# Altium PCB BTL_mach_nap_acquy_12v.PcbDoc
Units mil, origin at the board's own origin, x right, y up, seen from the top; angles counter-clockwise.
Board outline 2785.03 x 2090.03 mil, 2 copper layers (Top Layer, Bottom Layer); 29 components, 17 nets, 70 pads, 0 vias.
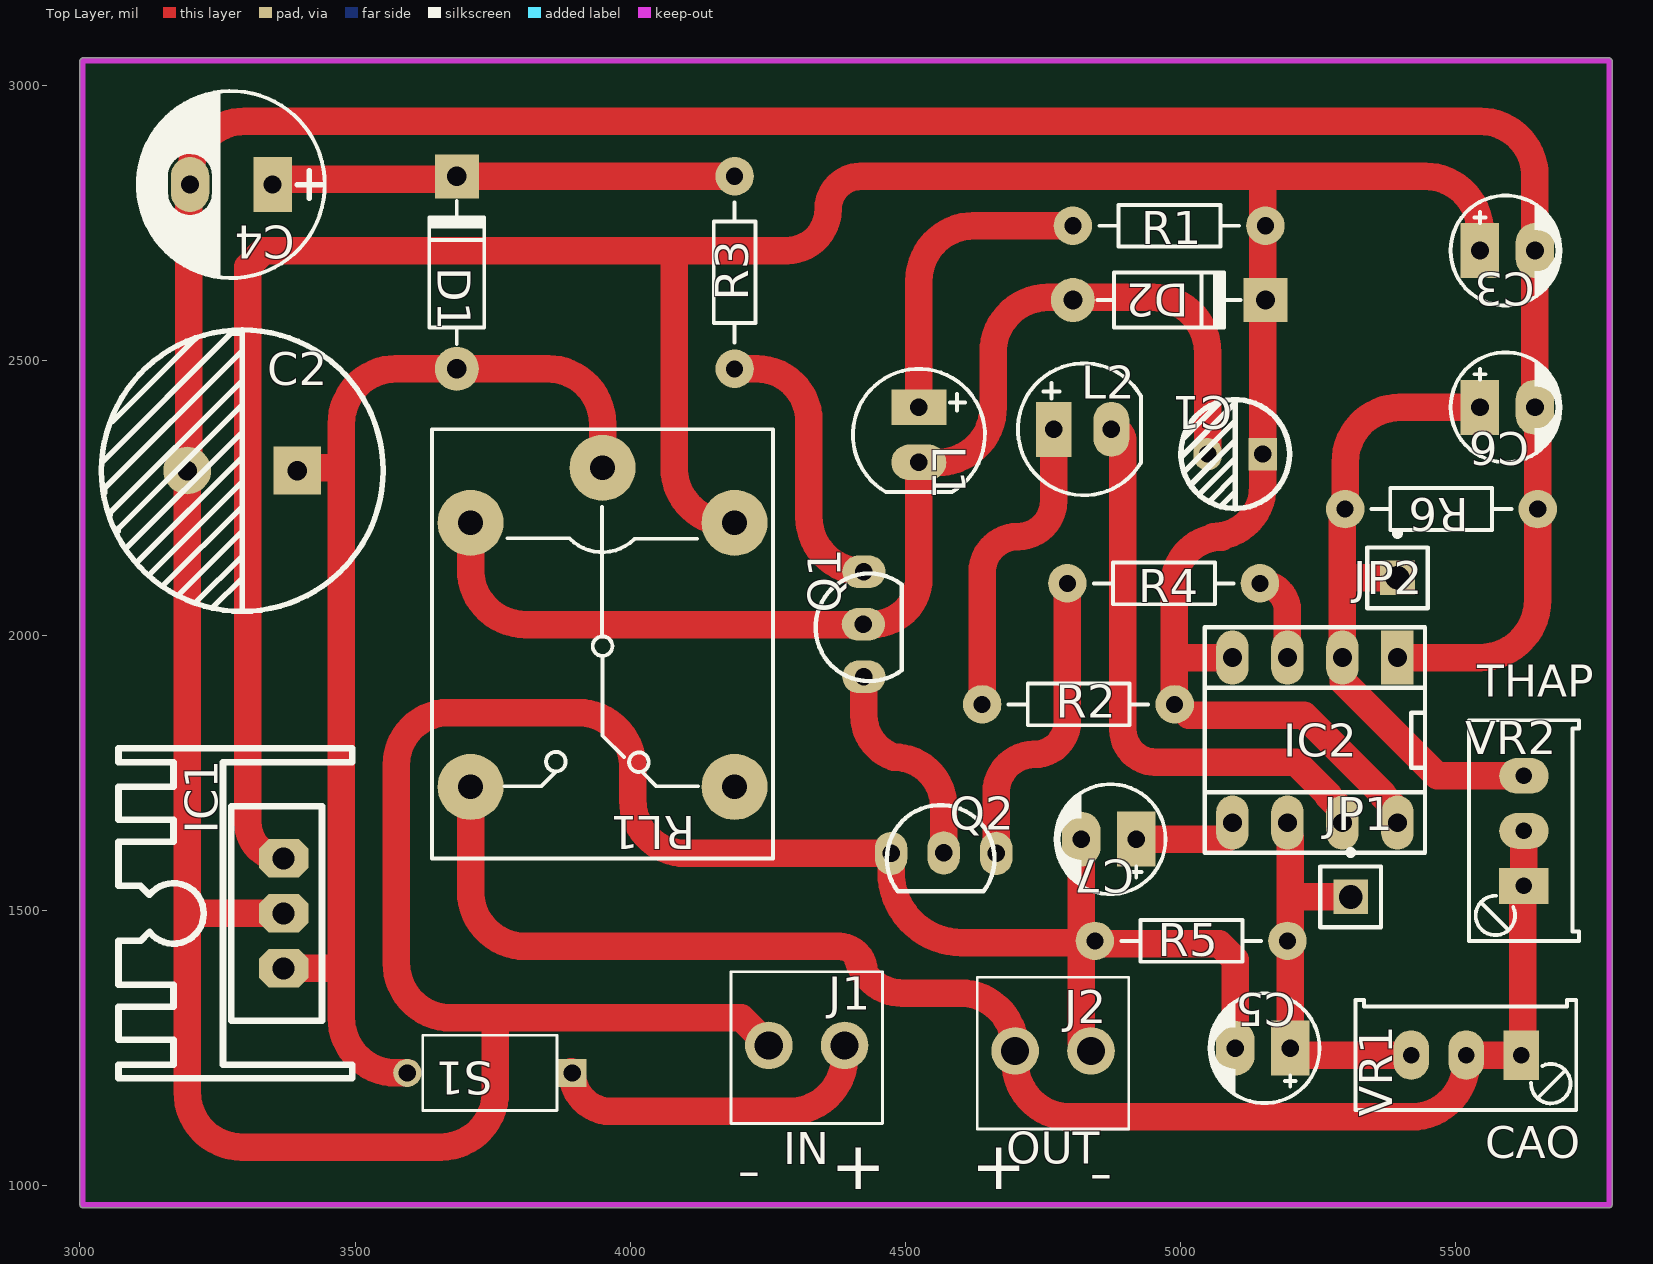
[diagram p0: Top Layer view]
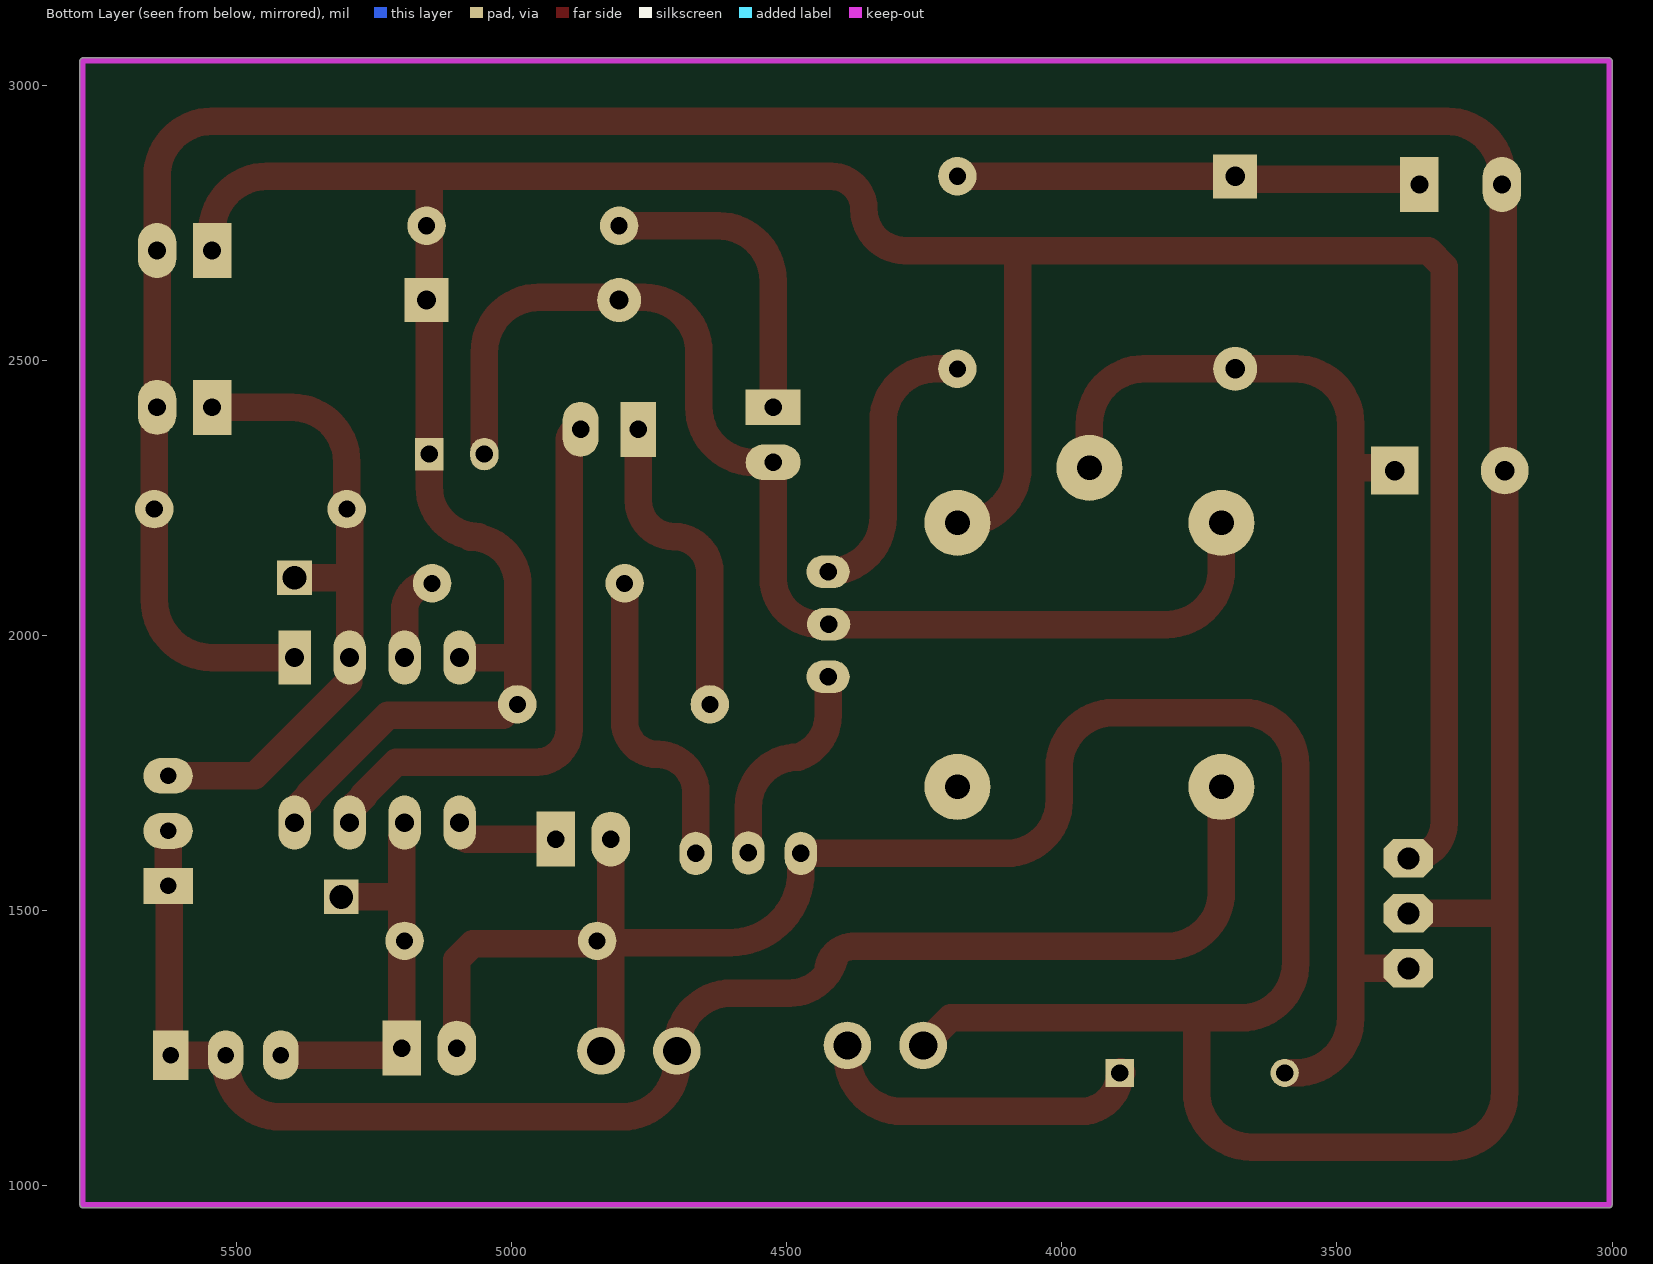
[diagram p1: Bottom Layer view, seen from below]
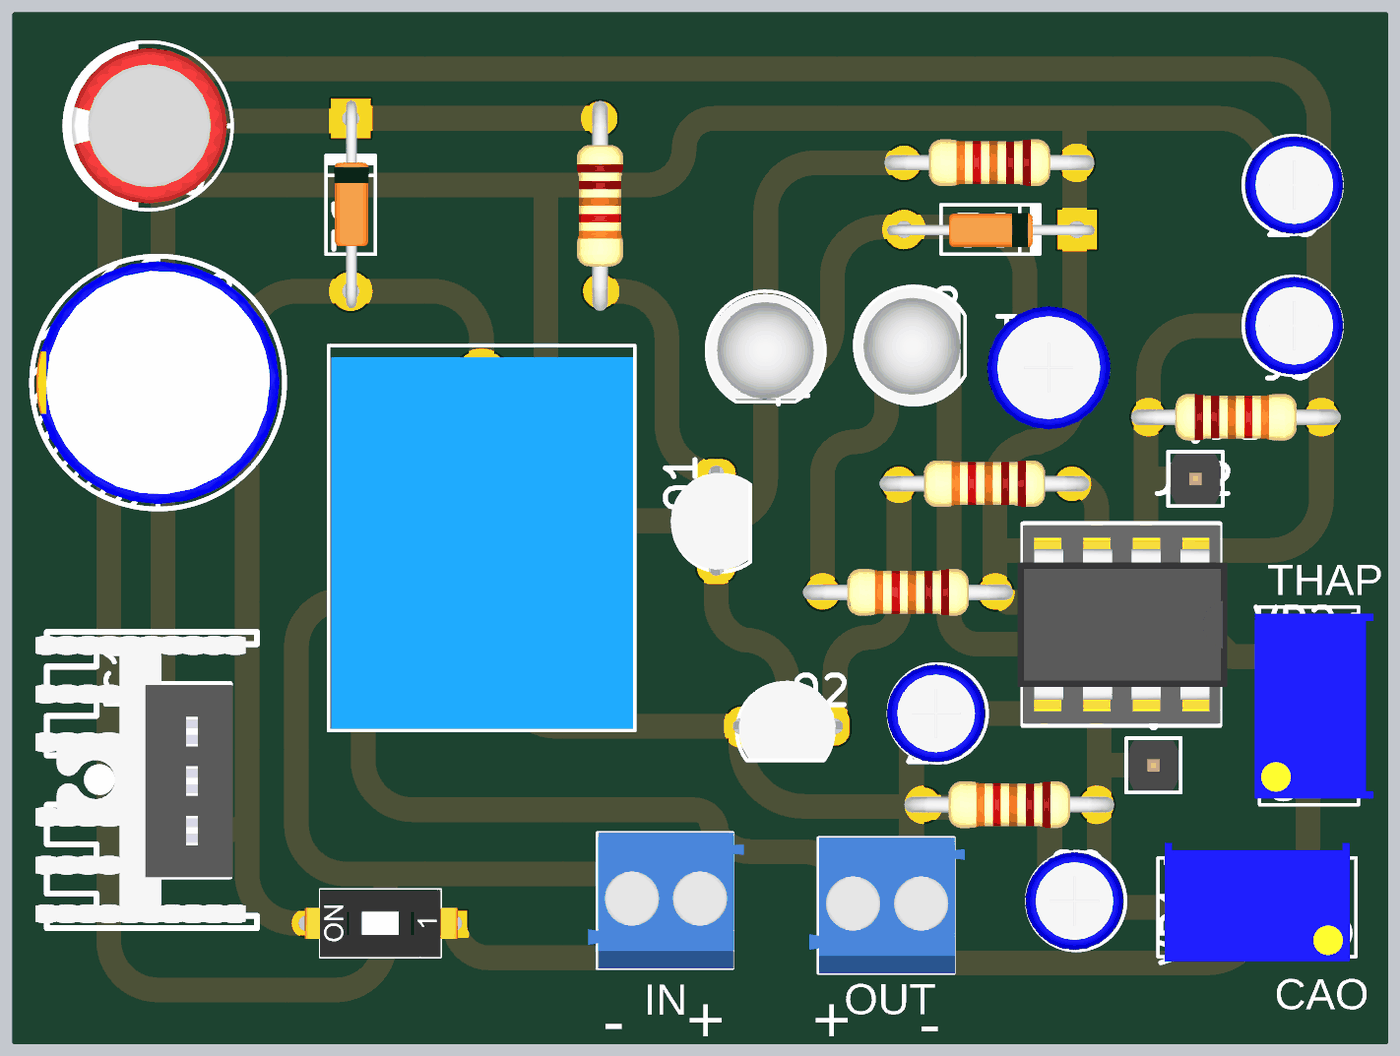
[diagram p2: 3D render of the assembled board from above, using the file's embedded part models]

## Layer stack, top to bottom
Top Solder: solder mask 0.4, Solder Resist, Dk 3.5
Top Layer: signal copper 1.4
Dielectric 1: dielectric 12.6, FR-4, Dk 4.8
Bottom Layer: signal copper 1.4
Bottom Solder: solder mask 0.4, Solder Resist, Dk 3.5

## Board outline
2999.99,965 2999.98,3045 cw(c3005,3045) 3005,3050.01 5780,3050.01 cw(c5780,3045) 5785.01,3045 5785.02,965 cw(c5780,965) 5780,959.99 3005,959.99 cw(c3005,965)

## Design rules (kind name [scope] priority, off if disabled: settings)
Clearance [All] p1: gap=20 ignorepadtopadclearanceinfootprint=FALSE
PolygonConnect [All] p1: connectstyle=Relief reliefconductorwidth=10 reliefentries=4 polygonreliefangle="90 Angle" airgapwidth=10
RoutingCorners [All] p1: cornerstyle=Round minsetback=100 maxsetback=100
RoutingVias [All] p1: holewidth=28 width=50 viastyle="Through Hole" minholewidth=28 minwidth=50 maxholewidth=28 maxwidth=50
SolderMaskExpansion [All] p1: expansion=4 istentingtop=FALSE
UnRoutedNet [All] p1: checkbadconnections=TRUE
Width [All] p1: maxlimit=50 minlimit=10 preferedwidth=30
28 further rules are at their usual default settings.

## Components (designator, comment, footprint, x,y, rotation, side; value= is the part's Value field where it differs from the comment)
C1 "100uF" "tu hoa 5mm" 5100,2330 r180 top
C2 "2200uF" "tu hoa 13mm" 3295,2300 r180 top
C3 "10uF" CP1/2 5545,2700 r0 top value=10uF/50V
C4 "470uF/35V" CP1.5/3.4 3350,2820 r180 top value=100uF/35V/50V
C5 "10uF" CP1/2 5200,1250 r180 top value=10uF/50V
C6 "10uF" CP1/2 5545,2415 r0 top value=10uF/50V
C7 "10uF" CP1/2 4920,1630 r180 top value=10uF/50V
D1 "1N4007" D1A 3685,2485 r270 top
D2 "1N4007" D1A 4805,2610 r180 top
IC1 "LM7812" QTO-220H3 3370,1395 r90 top value=LM7805
IC2 "LM555" DIP8 5246.99,1810 r270 top
J1 "KF2" KF2-3.5 4321.1,1255 r0 top
J2 "KF2" KF2-3.5 4768.9,1245 r0 top
JP1 "JP 1x1 2.54" "JP 1x1 DT" 5310,1525 r0 top
JP2 "JP 1x1 2.54" "JP 1x1 DT" 5395,2105 r0 top
L1 "LED 5mm" LED-5MM-RED 4525,2415 r270 top
L2 "LED 5mm" LED-5MM-Green 4775,2375 r0 top
Q1 "NPN c1815" TRAN-LOWPOWER 4430,2015 r0 top
Q2 "NPN c1815" TRAN-LOWPOWER 4564.53,1599.06 r270 top
R1 "1k" R1/4W 4805,2745 r0 top value="R1/4W - 1K"
R2 "1k" R1/4W 4640,1875 r0 top value="R1/4W - 1K"
R3 "10k" R1/4W 4190,2485 r90 top value="R1/4W - 1K"
R4 "4k7" R1/4W 4795,2095 r0 top value="R1/4W - 1K"
R5 "1k5" R1/4W 4845,1445 r0 top value="R1/4W - 1K"
R6 "2k2" R1/4W 5650,2230 r180 top value="R1/4W - 1K"
RL1 "Relay 10A/12V" "RELAY 5" 3950,1980 r270 top value="Relay SPDT, 10A, 12V"
S1 "" SW-DIP1 3745,1205 r90 top
VR1 "5k" VR1 5620,1237.5 r180 top value="VR 10K"
VR2 "5K" VR1 5625,1545 r90 top value="VR 10K"

## Footprints (in the part's own frame and the unit in brackets; to place one, negate y for a bottom-side part, rotate by r counter-clockwise, add the part's x,y. Pads: shape width x height; smd on the part's side, far side on the other; paste and mask are expansions set on the pad)
CP1.5/3.4 [mil] "Tu hoa 220->470uF,16V, 470uF/16V,25V"
  rect 70x100 hole 32: 1(0,0)
  oval 70x100 hole 32: 2(150,0)
  silkscreen extent -95,-170 245,170, body extent -85,-157 230,157, height 446
CP1/2 [mil] "Tu hoa < 22uF/16>50V"
  rect 70x100 hole 32: 1(0,0)
  oval 70x100 hole 32: 2(100,0)
  silkscreen extent -53,-100 147,100, body extent -49,-99 149,99, height 287
D1A [mil] "Diode 1A, W 100mil, L 350mil"
  round 80 hole 35: 1(0,0)
  rect 80x80 hole 35: 2(-350,0)
  silkscreen extent -305,-50 -45,50, body extent -386,-33 34,36, height 84
DIP8 [mm]
  rect 2.5x1.5 hole 0.864: 1(-3.81,3.759)
  oval 2.5x1.5 hole 0.864: 2(-3.81,1.219) 3(-3.81,-1.321) 4(-3.81,-3.861) 5(3.81,-3.861) 6(3.81,-1.321) 7(3.81,1.219) 8(3.81,3.759)
  silkscreen extent -5.21,-5.13 5.21,5.03, body extent -5.08,-5.4 5.08,5.4, height 8.1
"JP 1x1 DT" [mm] "1pins, 1 row, straight, gold plating"
  rect 1.6x1.6 hole 1.1: 1(0,0)
  silkscreen extent -1.4,-1.4 1.4,2.17, body extent -1.27,-1.27 1.27,1.27, height 8.54
KF2-3.5 [mm] "3,50mm - modular - blue - Horizontal wire entry - Pressure clamp - 8,4mm height - 02p"
  round 2.2 hole 1.3: 1(-1.75,0) 2(1.75,0)
  silkscreen extent -3.5,-3.6 3.5,3.4, body extent -3.95,-3.6 4.05,3.4, height 8.41
LED-5MM-Green [mil] "LED 2 PIN, 5 ly , Only colour,pin to pin 100mil"
  rect 65x100 hole 32: 1(-5,0)
  oval 65x100 hole 32: 2(100,0)
  silkscreen extent -70,-120 154,120, body extent -69,-120 145,117, height 339
LED-5MM-RED [mil] "LED 2 PIN, 5 ly , Only colour,pin to pin 100mil"
  rect 65x100 hole 32: 1(0,0)
  oval 65x100 hole 32: 2(100,0)
  silkscreen extent -70,-120 154,120, body extent -65,-119 149,118, height 339
QTO-220H3 [mil] "TO-220 1-2-3"
  oct 70x90 hole 40: 1(0,0) 2(100,0) 3(200,0)
  silkscreen extent -200,-125 400,300, body extent -190,-102 392,323, height 984
R1/4W [mil] "R 1/4W, 2 Pin, 350mil"
  round 70 hole 31: 1(0,0) 2(350,0)
  silkscreen extent 48,-38 302,38, body extent -40,-47 386,47, height 111
"RELAY 5" [mil] "Reley DPDT, 8 pin, 1A, W400mil, L800mil,H 300mil"
  round 120 hole 45: 1(-325,0) 2(255,240) 3(255,-240) 4(-225,-240) 5(-225,240)
  silkscreen extent -395,-310 385,310, body extent -371,-304 381,306, height 602
SW-DIP1 [mm]
  rect 1.3x1.3 hole 0.8: 1(0,-3.81)
  round 1.3 hole 0.8: 2(0,3.81)
  silkscreen extent -1.74,-3.1 1.74,3.1, body extent -1.74,-3.98 1.74,3.89, height 3.95
TRAN-LOWPOWER [mm] "TO, Flat Index; 3 In-Line, Axial Leads; Body Dia. 4.5mm; Leads 0.51 x 0.48 mm (max)"
  oval 2x1.5 hole 0.8: 1(-0.127,-2.286) 2(-0.151,0.139) 3(-0.127,2.564)
  silkscreen extent -2.35,-2.48 1.63,2.48, body extent -2.48,-2.79 1.52,3.01, height 11
"tu hoa 5mm" [mm]
  rect 1.3x1.5 hole 0.8: 1(-1.27,0)
  oval 1.3x1.5 hole 0.8: 2(1.27,0)
  silkscreen extent -2.51,-2.51 2.51,2.51, body extent -3.12,-3.18 3.23,3.18, height 14.55
"tu hoa 13mm" [mm]
  rect 2.2x2.2 hole 0.9: 1(-2.54,0)
  round 2.2 hole 0.9: 2(2.54,0)
  silkscreen extent -6.5,-6.5 6.5,6.5, body extent -6.25,-6.25 6.26,6.25, height 23.02
VR1 [mil] "Variable Resistor"
  rect 65x90 hole 30: 1(0,0)
  oval 65x90 hole 30: 2(100,0) 3(200,0)
  silkscreen extent -100,-100 301,100, body extent -88,-130 288,110, height 455

## Part data
C1: library part "Tu Hoa 100uF 25V 6x11", "Cắm", Chung_Loai=Cắm, Don_Vi=Con, Ma_Hang=MH001351, So_Chan=2, Ten_Linh_Kien="Tụ Hóa 100uF 25V 6x11MM"
C2: library part "Tu Hoa 2200uF 25V 13x20", "Cắm", Chung_Loai=Cắm, Don_Vi=Con, Ma_Hang=MH002203, So_Chan=2, Ten_Linh_Kien="Tụ Hóa 2200uF 25V 13x20MM"
C3 C5 C6 C7: library part CP1, "Cap P  0,1uF < 22uF , 16 - 50V", Description 1="10 => 220uF/6,3V/10V - 10uF => 100uF/16V", Description 2="0,1uF => 33uF/50V - 10uF => 22uF/63V", Description 3="0,47uF => 10uF/100V"
C4: library part CP3, "Cap 100uF/35V - 470uF/16V", Description 1="1000uF/6,3V - 470uF/16V - 330uF - 25V", Description 2="220uF/35V - 100uF/50V - 63V - 4,7uF/200V", Description 3="22uF => 33uF100V - 3,3uF => 4,7uF/250V", Description 4="2,2uF =>3,3uF/350 - 2,2uF/400V - 1uF/450V"
D1 D2: library part "Diode 1A", "Diode 1A"
IC1: library part LM78xx, "On ap +, from + 5 to + 24VDC"
IC2: "Timer Circuits"
J1 J2: Manufacturer="Würth Elektronik eiSos GmbH", partNo=691103110002, ComponentLink1 Description=Manufacturer, ComponentLink1URL=http://www.we-online.com, ComponentLink2 Description=Datasheet, ComponentLink2URL=http://katalog.we-online.de/em/datasheet/6911031100xx.pdf, Created by="Karrer Zheng", Created Date="29 October 2013", NoPins=2
JP1 JP2: library part "JP 1x1 2.54 Duc Cong", "Cắm", Chung_Loai=Cắm, Don_Vi=Con, Ma_Hang=MH000904, Ten_Linh_Kien="Jump Đơn Đực 2.54MM 1x40P Cong Đứng"
L1: library part "LED 5mm Do", "Cắm", Chung_Loai=Cắm, Don_Vi=Con, Ma_Hang=MH008967, Ten_Linh_Kien="Led 5MM Phủ Đỏ (1000c)"
L2: library part "LED 5mm Xanh La", "Cắm", Chung_Loai=Cắm, Don_Vi=Con, Ma_Hang=MH008969, Ten_Linh_Kien="LED 5MM Phủ Xanh (1000c)"
Q1 Q2: library part NPN, "NPN General", PackageDocument=Sep-1998, Code_JEDEC=TO-92A, ComponentLink1Description="Manufacturer Link", ComponentLink1URL=http://www.fairchildsemi.com/, ComponentLink2Description=Datasheet, ComponentLink2URL=http://www.fairchildsemi.com/ds/2N%2F2N3904.pdf, DatasheetDocument=1997, LatestRevisionDate=15-Jan-2003, LatestRevisionNote="PCB Footprint 'BCY-W3/D4.7' replaced", PackageReference=TO-92A, Published=8-Jun-2000, Publisher="Altium Limited"
R1 R2 R3 R4 R5 R6: library part R1/4W, "Resistor 1/4W"
RL1: library part "Relay 5", "Relay SPDT,10A - 12VDC 5 Pin"
S1: library part SWDIP1, "WS-DITV 2.54 mm small compact THT flat actuator with top tape", Manufacturer="Wurth Elektronik", Part No.=418127160901, ComponentLink1 Description=Manufacturer, ComponentLink1URL=http://www.we-online.com, ComponentLink2 Description=Datasheet, ComponentLink2URL=http://katalog.we-online.de/em/datasheet/4181271609xx.pdf, Created by="Baojun Chen", Created Date=Dec.2015, Pole=01
VR1 VR2: library part VR, "Var Resistor"

## Nets (pads, with @x,y where several pads share a name; then routed paths per layer and width w, separated by ;. In a path a pad name is that pad's centre, name@x,y a point inside that pad or via, vN(x,y) a via of type N, cw(c..) or ccw(c..) an arc to the next point about the centre after c; other vN are vias at no path point)
15v: C2.1 D1.1 IC1.1 RL1.1 S1.2 | length 2115.4
  Top Layer w50: IC1.1 3470,1395 3475,1400 ; C2.1 3400,2305 3475,2305 ; S1.2 3575,1205 cw(c3575,1305) 3475,1305 3475,1400 ; RL1.1 3950,2385 ccw(c3850,2385) 3850,2485 D1.1 3575,2485 ccw(c3575,2385) 3475,2385 3475,2305 ; 3475,1400 3475,2305
+12: C1.1 C3.1 D2.2 IC1.3 IC2.4 IC2.8 R1.2 R2.2 RL1.5 | length 5778.4
  Top Layer w50: IC1.3 cw(c3370,1660) 3362.41,1595.44 cw(c3370,1660) 3305,1660 3305,2670.71 3334.29,2700 4080,2700 ; RL1.5 4180,2205 cw(c4180,2305) 4135.98,2215.21 cw(c4180,2305) 4080,2305 4080,2700 ; 5060,2180 ccw(c5060,2270) 5083.47,2183.11 ccw(c5060,2270) 5150,2270 C1.1 5150,2605 D2.2 cw(c5155,2615) 5150,2615 5150,2835 ; 5075.73,2179.2 ccw(c5075.73,2092.46) 5029.52,2165.86 ccw(c5075.73,2092.46) 4994.56,2123.02 ccw(c5075.73,2092.46) 4988.99,2092.46 4988.99,1965 ; IC2.4 4993.99,1960 4988.99,1965 ; IC2.8 5395,1682.14 5369.53,1707.61 5369.53,1710.56 5225.08,1855 5015.41,1855 4995.41,1875 R2.2 4988.99,1876.01 4988.99,1965 ; C3.1 5545,2735 ccw(c5445,2735) 5445,2835 5150,2835 ; 4080,2700 4285,2700 ccw(c4285,2775) 4360,2775 cw(c4420,2775) 4420,2835 5150,2835
battery: J2.1 RL1.3 VR1.1 VR1.2 VR2.1 VR2.2 | length 2841.5
  Top Layer w50: RL1.3 3710,1535 ccw(c3810,1535) 3810,1435 4380,1435 cw(c4380,1390) 4411.72,1421.92 ; 4425,1390 ccw(c4380,1390) 4411.72,1421.92 ; VR1.2@5520,1250 5520,1225 cw(c5420,1225) 5420,1125 4800,1125 cw(c4800,1225) 4700,1225 J2.1 4700,1250 ccw(c4600,1250) 4600,1350 4495.71,1350 cw(c4495.71,1435) 4462.56,1356.73 cw(c4495.71,1435) 4411.72,1421.92 ; VR1.2@5529.29,1237.5 VR1.1 ; VR1.1@5620,1250 5622.5,1252.5 5622.5,1542.5 VR2.1 VR2.2
discharge: IC2.7 L2.2 | length 1050.9
  Top Layer w50: L2.2 cw(c4875,2354.01) 4895.99,2354.01 4895.99,1829.01 ccw(c4955,1829.01) 4955,1770 5210.08,1770 5269.53,1710.56 5269.53,1707.61 5295,1682.14 IC2.7
gnd: C2.2 C3.2 C4.2 C5.2 C6.2 C7.2 IC1.2 IC2.1 J1.1 J2.2 Q2.1 R5.1 R6.1 | length 9797
  Top Layer w50: 3195,1665 3195,1505 ; 3195,1671.01 C2.2 3197.5,2302.5 3197.5,2817.5 C4.2 3200,2835 cw(c3300,2835) 3300,2935 5545,2935 cw(c5545,2835) 5645,2835 C3.2 C6.2 ; IC1.2 3205,1495 3195,1505 ; J1.1 4202.2,1305 3755,1305 ; C7.2 R5.1@4820,1441.81 ; R5.1@4864.14,1440 5070.71,1440 5100,1410.71 C5.2 ; IC2.1 5545,1960 ccw(c5545,2065) 5650,2065 R6.1 C6.2@5650,2380.86 ; 3195,1505 3195,1170 ccw(c3295,1170) 3295,1070 3655,1070 ccw(c3655,1170) 3755,1170 3755,1305 ; 3755,1305 3675,1305 cw(c3675,1405) 3575,1405 3575,1765 cw(c3670,1765) 3670,1860 3905,1860 cw(c3905,1760) 4005,1760 4005,1700 ccw(c4100.94,1700) 4100.94,1604.06 Q2.1 4474.53,1570 ccw(c4602.72,1570) 4602.72,1441.81 R5.1@4820,1441.81 ; J2.2@4820,1272.7 4820,1262.8 ccw(c4837.8,1262.8) J2.2 4837.8,1254.91 J2.2@4820,1272.7 ; J2.2@4820,1272.7 R5.1@4820,1441.81
  Bottom Layer w50: R5.1@4841.17,1441.17 R5.1
NetC1_2: C1.2 D2.1 L1.2 Q1.2 RL1.4 | length 2196.8
  Top Layer w50: RL1.4 3710,2120 ccw(c3810,2120) 3810,2020 4423.59,2020 Q1.2 4439.57,2020.4 4439.69,2020.4 ccw(c4440.49,2104.91) 4525,2104.91 L1.2 4560,2315 ccw(c4560,2415) 4583.79,2317.87 ccw(c4560,2415) 4660,2415 4660,2515 cw(c4760,2515) 4728.78,2610 cw(c4760,2515) 4760,2615 4810,2615 4950,2615 cw(c4950,2515) 5050,2515 C1.2
NetC5_1: C5.1 IC2.6 JP1.1 R5.2 VR1.3 | length 706.3
  Top Layer w50: R5.2 5198.83,1441.17 5198.83,1427.03 5200,1425.86 C5.1@5200,1275 ; IC2.6 5195,1637.86 5200,1632.86 5200,1525 ; C5.1 ccw(c5212.5,1250) 5212.5,1237.5 VR1.3 ; R5.2@5200,1465 5200,1525 ; JP1.1 5200,1525
NetC6_1: C6.1 IC2.2 JP2.1 R6.2 VR2.3 | length 1358
  Top Layer w50: R6.2@5295,2230 5295,2105 ; R6.2 5300,2315 ; JP2.1 5295,2105 ; C6.1 5400,2415 ; VR2.3 5467.62,1745 5296.73,1915.89 5296.73,1958.27 IC2.2 5295,2105 ; 5300,2315 cw(c5400,2315) 5400,2415 ; 5300,2315 cw(c5400,2315) 5400,2415
NetC7_1: C7.1 IC2.5 | length 197.5
  Top Layer w50: C7.1 5082.23,1630 5095,1642.77 IC2.5
NetJ1_2: J1.2 S1.1 | length 614.2
  Top Layer w50: S1.1@3891.42,1205.59 S1.1@3892.91,1207.09 ; S1.1 ccw(c3965,1205) 3965,1135 4290,1135 ccw(c4290,1235) 4388.4,1217.18 ccw(c4290,1235) 4390,1235 J1.2
NetL1_1: L1.1 R1.1 | length 567.1
  Top Layer w50: L1.1 4525,2645 cw(c4625,2645) 4625,2745 R1.1
NetL2_1: L2.1 R2.1 | length 574.2
  Top Layer w50: R2.1 4640,2115 cw(c4705,2115) 4705,2180 ccw(c4705,2245) 4770,2245 L2.1
NetQ1_1: Q1.1 Q2.2 | length 395.6
  Top Layer w50: Q1.1 4425,1855 ccw(c4505,1855) 4479.7,1779.11 cw(c4479.7,1688.81) 4506.65,1774.99 cw(c4479.7,1688.81) 4570,1688.81 Q2.2
NetQ1_3: Q1.3 R3.1 | length 520.4
  Top Layer w50: R3.1 4230,2485 cw(c4230,2390) 4325,2390 4325,2215.94 ccw(c4425,2215.94) 4406.47,2117.68 ccw(c4425,2215.94) Q1.3
NetQ2_3: Q2.3 R4.1 | length 564.9
  Top Layer w50: Q2.3 4665.47,1714.53 cw(c4735,1714.53) 4735,1784.06 ccw(c4735,1844.06) 4795,1844.06 R4.1
tran_1: C4.1 D1.2 R3.2 | length 846.2
  Top Layer w50: C4.1 3360,2830 3680,2830 D1.2 R3.2
tran_2: IC2.3 R4.2 | length 163.5
  Top Layer w50: R4.2 cw(c5145,2045) 5150.74,2094.67 cw(c5145,2045) 5195,2045 IC2.3
pads on no net: RL1.2

## Keep-outs
Keep-Out Layer:
  lines w10: 3005,965 5780,965 5780,3045 3005,3045 3005,965

## Silkscreen, mask and mechanical layers (free items; w line width, h text height)
Top Overlay:
  text "THAP" at 5540,1870 h100
  text "CAO" at 5555,1031.07 h100
  text "OUT" at 4683.65,1021.07 h100
  text "IN" at 4278.11,1020 h100
  text "+" at 4365,964.48 h150
  text "+" at 4620,964.48 h150
  text "-" at 4195,961.16 h150
  text "-" at 4835,956.16 h150